# Altium PCB PCB.PcbDoc (part 3 of 3)
Units mm, origin at the board's own origin, x right, y up, seen from the top; angles counter-clockwise.
Board outline 224 x 132 mm, 4 copper layers (Top Layer, Signal Layer 1, Signal Layer 2, Bottom Layer), stack 0.778 mm thick; 181 components, 179 nets, 1018 pads, 539 vias.
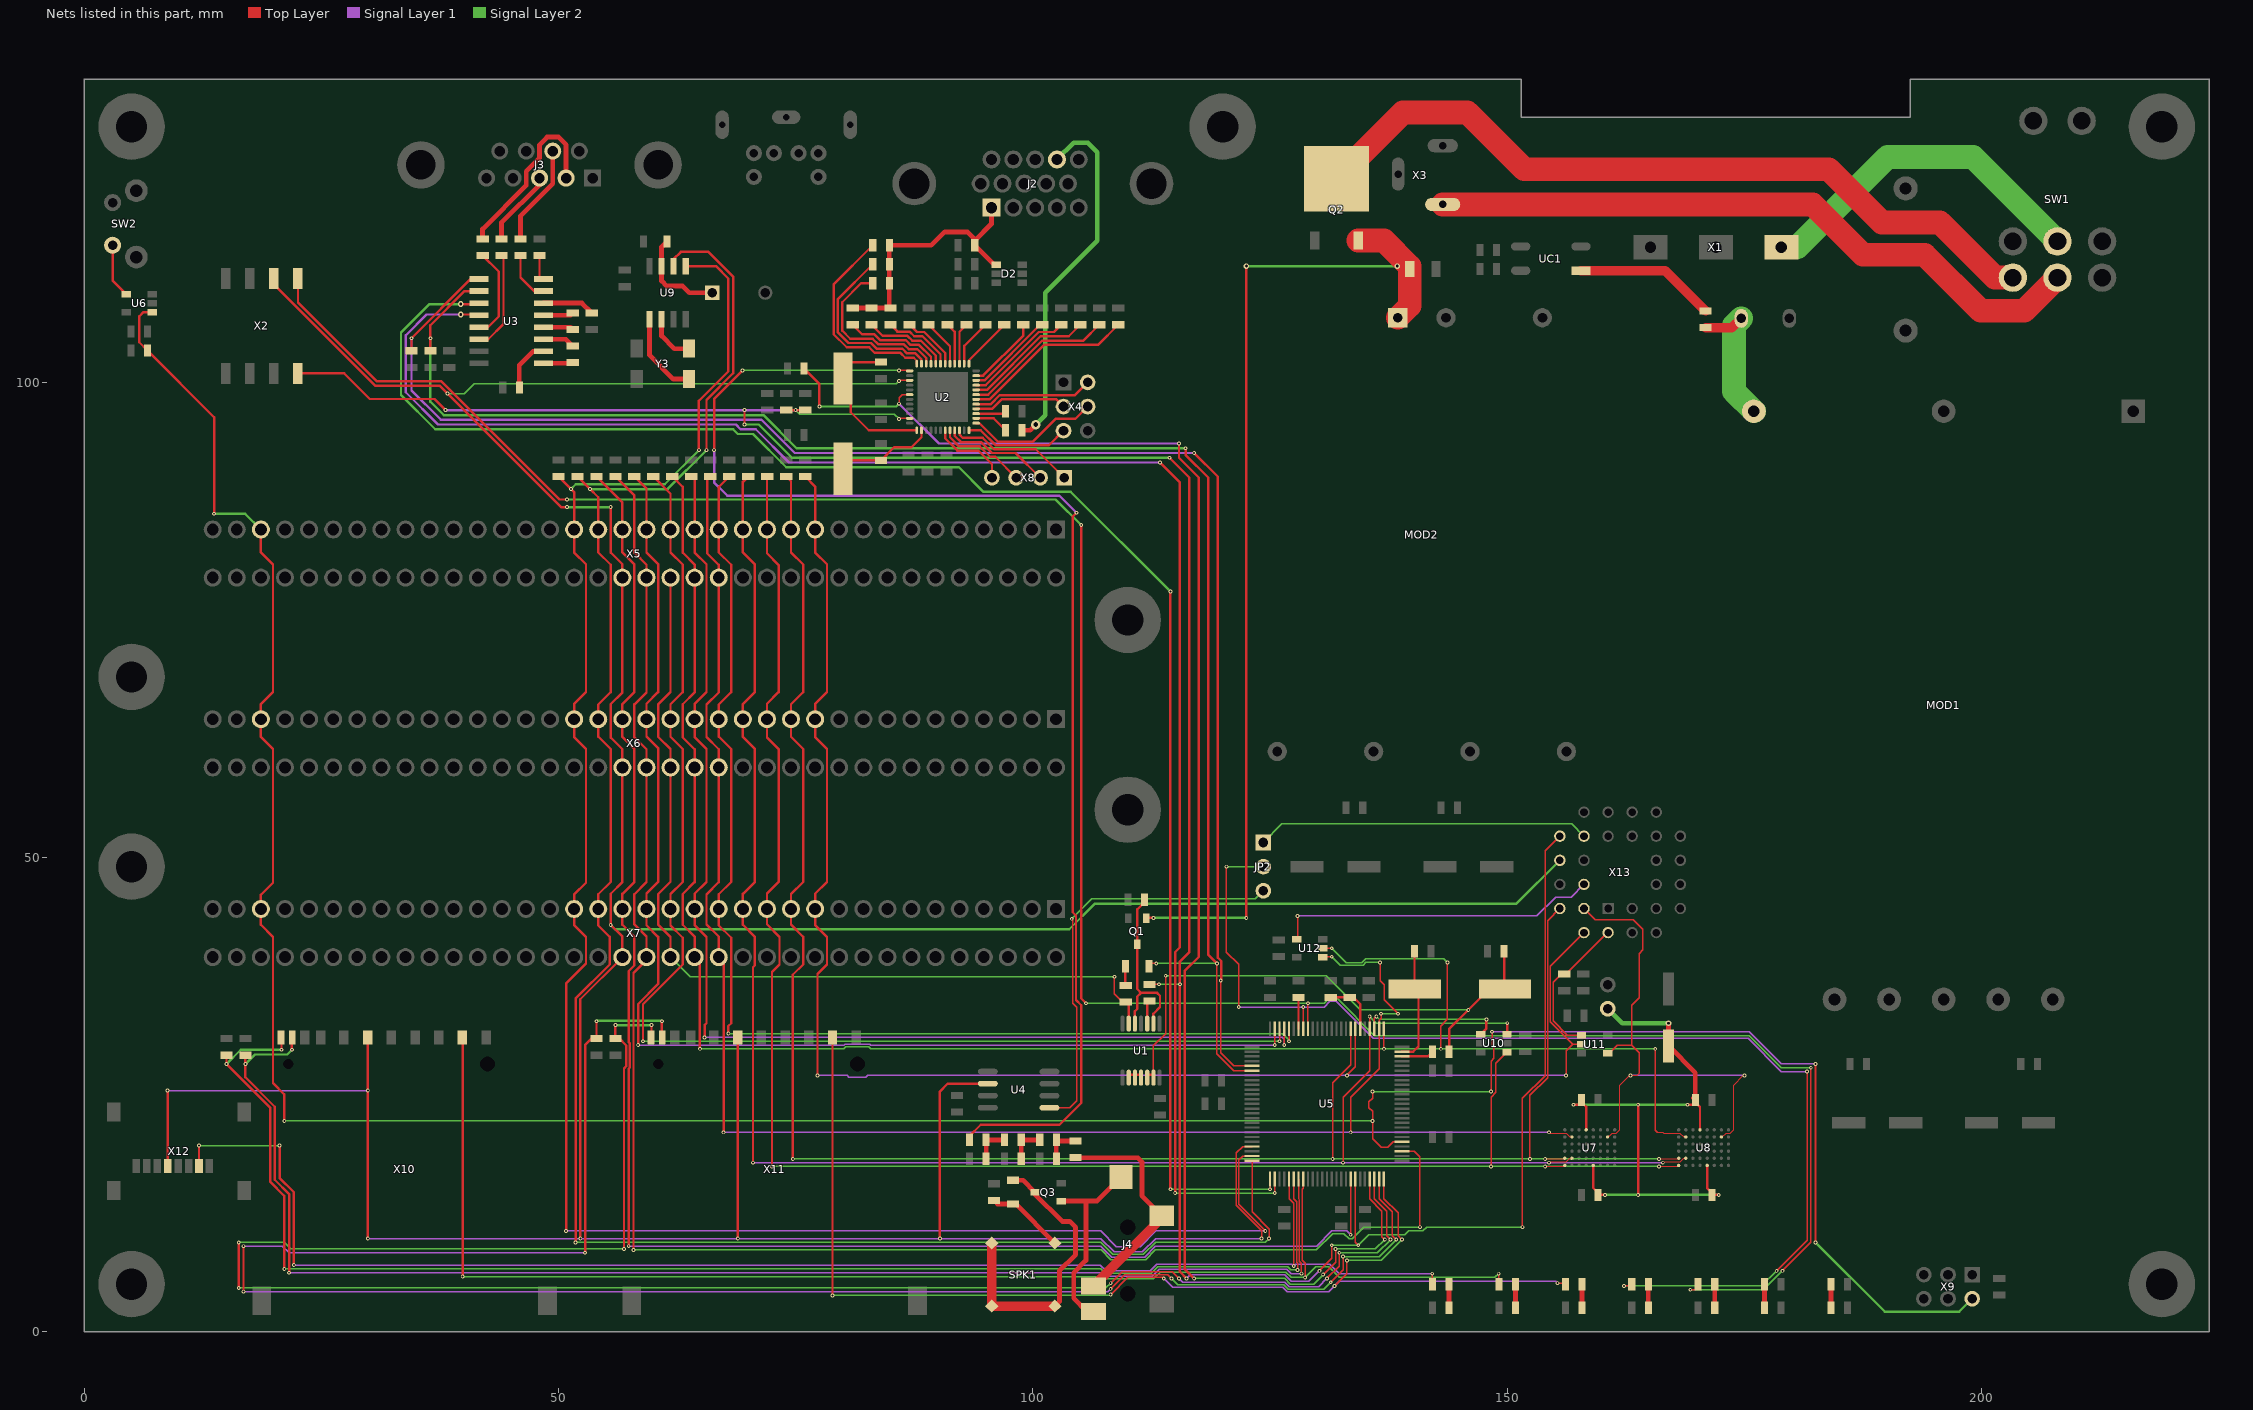
[diagram p5: the nets of this part, all layers, seen from the top]

## Via types
v1: diameter 0.4, hole 0.2, Top Layer to Bottom Layer, tented both sides, 453 vias
v2: diameter 0.6, hole 0.3, Top Layer to Bottom Layer, tented both sides, 46 vias
v3: diameter 1, hole 0.5, Top Layer to Bottom Layer, tented both sides, 34 vias
v4: diameter 2.5, hole 1.25, Top Layer to Bottom Layer, tented both sides, 5 vias
v5: diameter 1, hole 0.5, Top Layer to Bottom Layer, tented bottom, 1 vias

## Nets (pads, with @x,y where several pads share a name; then routed paths per layer and width w, separated by ;. In a path a pad name is that pad's centre, name@x,y a point inside that pad or via, vN(x,y) a via of type N, cw(c..) or ccw(c..) an arc to the next point about the centre after c; other vN are vias at no path point) (continued)
NetC14_1: C14.1 MOD2.1 Q1.1 Q2.2 | length 108.8
  Top Layer w0.25: Q1.1@111.95,43.575 111.975,43.6 v1(112.7,43.6) ; v1(122.5,43.6) v2(122.5,112.3)
  Top Layer w0.5: v2(138.4,112.3) 139.425,112.3 C14.1@139.725,112
  Top Layer w2.5: Q2.2@134.285,114.99 137.01,114.99 C14.1@139.725,112.275 ; MOD2.1@138.46,106.86 139.725,108.125 C14.1@139.725,112
  Signal Layer 2 w0.25: v1(112.7,43.6) v1(122.5,43.6) ; v2(122.5,112.3) v2(138.4,112.3)
NetC16_1: C16.1 U3.1 | length 3.1
  Top Layer w0.5: U3.1@48.4,102.05 51.425,102.05 C16.1@51.5,102.125
NetC16_2: C16.2 U3.3 | length 3.4
  Top Layer w0.5: U3.3@48.4,104.59 50.785,104.59 C16.2@51.5,103.875
NetC19_1: C19.1 U3.5 | length 3.2
  Top Layer w0.5: U3.5@48.4,107.13 51.255,107.13 C19.1@51.5,107.375
NetC19_2: C19.2 U3.4 | length 3.2
  Top Layer w0.5: U3.4@48.4,105.86 51.265,105.86 C19.2@51.5,105.625
NetC20_2: C20.2 U3.2 | length 5.5
  Top Layer w0.5: C20.2@45.875,99.5 45.875,101.875 47.32,103.32 U3.2@48.4,103.32
NetC21_2: C21.2 U3.6 | length 5.5
  Top Layer w0.5: U3.6@48.4,108.4 52.475,108.4 C21.2@53.5,107.375
NetC22_1: C22.1 U2.13 Y1.2 | length 17.4
  Top Layer w0.25: C22.1@84,102.175 80,102.175 Y1.2@80,100.45 80.8,99.65 80.8,96.9 82.696,95.004 U2.13@87.762,95.004
NetC24_1: C24.1 U2.14 Y1.1 | length 10.4
  Top Layer w0.25: Y1.1@80,90.95 80.875,91.825 C24.1@84,91.825 85.375,93.2 87.2,93.2 88.262,94.262 U2.14@88.262,95.004
NetC34_1: C34.1 C39.2 R43.2 | length 4.1
  Top Layer w0.5: C39.2@102.475,18.2 R43.2@102.475,20.2 102.6,20.075 C34.1@104.5,20.075
NetC34_2: C34.2 J4.2 J4.3 | length 24.1
  Top Layer w0.5: C34.2@104.5,18.325 111.075,18.325 111.5,17.9 111.5,14.3 J4.2@113.6,12.2
  Top Layer w1: J4.3@106.4,4.8 113.6,12 J4.2@113.6,12.2
NetC35_2: C35.2 L1.1 U5.31 | length 5.6
  Top Layer w0.25: C35.2@131.4,35.225 L1.1@133.4,35.225 ; L1.1@133.8,35.225 134.5,34.525 U5.31@134.5,31.9
NetC36_1: C36.1 R44.2 U1.12 U1.13 Y2.2 | length 61.4
  Top Layer w0.15: U1.13@112.705,26.759 112.705,27.059 112.705,30.105 114,31.4 v1(114,37.5)
  Top Layer w0.25: U1.12@112.055,27.059 U1.13@112.705,27.059 ; R44.2@143.875,29.5 143.875,31.875 v1(145.9,33.9) 148.1,36.1 Y2.2@149.75,36.1 ; C36.1@149.675,40.1 149.675,36.575 Y2.2@150.075,36.175 ; Y2.2@150.15,36.1 Y2.2@150.075,36.175 ; Y2.2@151.975,36.175 Y2.2@150.075,36.175
  Signal Layer 2 w0.15: v1(114,37.5) 130.9,37.5 134.5,33.9 v1(145.9,33.9)
NetC37_2: C37.2 R41.2 R42.1 | length 4
  Top Layer w0.5: C37.2@95.075,18.2 R41.2@95.075,20.2 R42.1@97.025,20.2
NetC38_2: C38.2 R42.2 R43.1 | length 3.9
  Top Layer w0.5: C38.2@98.775,18.2 R42.2@98.775,20.2 R43.1@100.725,20.2
NetC40_2: C40.2 U5.44 | length 3.2
  Top Layer w0.25: U5.44@128,31.9 C40.2@128,35.125
NetC41_1: C41.1 U5.24 Y2.1 | length 12.2
  Top Layer w0.25: U5.24@138.9,29.5 140.1,29.5 140.65,30.05 140.65,35.7 Y2.1@140.25,36.1 140.225,36.125 C41.1@140.225,40.1 ; Y2.1@140.625,36.125 Y2.1@140.65,36.1
NetC43_1: C43.1 C44.1 C45.1 C46.1 C51.1 JP1.2 U7.D6 U7.E1 U8.D6 U8.E1 | length 66.8
  Top Layer w0.25: v1(157,23.9) 157.55,23.9 C43.1@157.825,24.175 ; C43.1@157.825,24.4 C43.1@157.825,24.175 ; U7.D6@158.323,21.263 158.323,23.677 C43.1@157.825,24.175 ; U7.E1@159.073,17.513 159.073,15.127 159.575,14.625 C45.1@159.575,14.4 v1(160.3,14.4) ; v1(163.8,14.4) v1(163.8,23.9) ; v1(169,23.9) 169.55,23.9 C44.1@169.825,24.175 ; C44.1@169.8,24.425 C44.1@169.825,24.4 C44.1@169.825,24.175 ; U8.D6@170.323,21.263 170.323,23.677 C44.1@169.825,24.175 ; U8.E1@171.073,17.513 171.073,15.127 171.575,14.625 C46.1@171.575,14.4 v1(172.3,14.4)
  Top Layer w0.5: v2(167,32.5) C51.1@167,30.1 169.825,27.275 C44.1@169.825,24.4 ; C44.1@169.6,24.625 C44.1@169.8,24.425
  Signal Layer 2 w0.25: v1(157,23.9) v1(163.8,23.9) v1(169,23.9) ; v1(160.3,14.4) v1(163.8,14.4) v1(172.3,14.4)
  Signal Layer 2 w0.5: JP1.2@160.6,34.03 162.13,32.5 v2(167,32.5)
NetC48_1: C48.1 D4.1 U9.7 | length 10.3
  Top Layer w0.5: D4.1@61.45,114.9 60.865,114.315 U9.7@60.865,112.3 60.865,110.735 61.4,110.2 63.1,110.2 63.8,109.5 C48.1@66.2,109.5
NetD1_1: D1.1 R7.2 | length 2
  Top Layer w0.25: D1.1@109.75,38.5 109.75,36.525 R7.2@109.8,36.475
NetD3_1: D3.1 R40.1 SPK1.1 | length 8.3
  Top Layer w0.5: R40.1@95.9,13.825 96.275,13.45 D3.1@97.9,13.45 98.197,13.45 SPK1.1@102.323,9.323
NetD3_2: D3.2 Q3.3 SPK1.2 | length 31.3
  Top Layer w0.5: D3.2@97.9,15.95 98.975,15.95 Q3.3@100.225,14.7 100.225,14.475 103.1,11.6 103.9,11.6 104.5,11 104.5,8.1 102.8,6.4 102.8,3.153 SPK1.2@102.323,2.677
  Top Layer w1: SPK1.2@95.677,9.323 SPK1.2@95.677,2.677 SPK1.2@102.323,2.677
NetF1_2: F1.2 MOD1.3 R1.1 | length 15.1
  Top Layer w1: R1.1@170.9,105.825 173.685,105.825 F1.2@174.66,106.8
  Signal Layer 2 w2.5: F1.2@174.66,106.8 173.9,106.04 173.9,99.1 MOD1.3@176,97
NetJ4_4: J4.4 J4.5 Q3.1 | length 20.8
  Top Layer w0.5: Q3.1@102.975,13.75 105.6,13.75 ; J4.5@106.4,2.1 105.7,2.1 104.3,3.5 104.3,6.2 105.6,7.5 105.6,13.75 ; J4.4@109.3,16.3 106.75,13.75 105.6,13.75
NetLED1_2: LED1.2 R27.1 | length 2.5
  Top Layer w0.5: LED1.2@184.125,2.5 R27.1@184.125,5
NetLED2_2: LED2.2 R32.1 | length 2.5
  Top Layer w0.5: LED2.2@177.125,2.5 R32.1@177.125,5
NetLED3_1: LED3.1 R53.2 | length 2.5
  Top Layer w0.5: LED3.1@171.875,2.5 R53.2@171.875,5
NetLED4_1: LED4.1 R54.2 | length 2.5
  Top Layer w0.5: LED4.1@164.875,2.5 R54.2@164.875,5
NetLED5_1: LED5.1 R55.2 | length 2.5
  Top Layer w0.5: LED5.1@157.875,2.5 R55.2@157.875,5
NetLED6_1: LED6.1 R59.2 | length 2.5
  Top Layer w0.5: LED6.1@150.875,2.5 R59.2@150.875,5
NetLED7_1: LED7.1 R62.2 | length 2.5
  Top Layer w0.5: LED7.1@143.875,2.5 R62.2@143.875,5
NetQ1_3: Q1.3 R4.2 U1.2 U1.5 | length 19.1
  Top Layer w0.25: U1.5@110.755,32.459 110.755,33.755 111,34 111,35.3 111.4,35.7 ; R4.2@111.775,45.5 111.775,45.275 111,44.5 Q1.3@111,40.825 111,36.1 111.4,35.7 ; U1.2@112.705,32.459 112.705,33.505 113.4,34.2 113.4,35.4 113.1,35.7 111.4,35.7
NetQ2_3: Q2.3 SW1.4 | length 81.4
  Top Layer w2.5: Q2.3@132.005,121.49 139.015,128.5 145.8,128.5 151.8,122.5 183.9,122.5 189.5,116.9 195.6,116.9 201.41,111.09 SW1.4@203.301,111.09
NetR1_2: R1.2 UC1.1 | length 14.9
  Top Layer w1: UC1.1@157.775,111.83 166.645,111.83 R1.2@170.9,107.575
NetR3_1: R3.1 U1.3 | length 2.5
  Top Layer w0.25: U1.3@112.055,32.459 112.055,34.58 R3.1@112.3,34.825
NetR5_1: R5.1 U2.48 | length 21.3
  Top Layer w0.25: R5.1@83.125,114.5 79,110.375 79,105.127 80.377,103.75 82.741,103.75 83.341,103.15 86.041,103.15 86.541,102.65 87.441,102.65 87.762,102.329 U2.48@87.762,102.004
NetR6_1: R6.1 U2.47 | length 19.2
  Top Layer w0.25: R6.1@83.125,112.5 79.45,108.825 79.45,105.314 80.564,104.2 82.927,104.2 83.527,103.6 86.227,103.6 86.727,103.1 87.627,103.1 88.262,102.465 U2.47@88.262,102.004
NetR8_1: R8.1 U2.46 | length 17.7
  Top Layer w0.25: R8.1@83.125,110.5 81.9,110.5 79.9,108.5 79.9,105.5 80.75,104.65 83.114,104.65 83.714,104.05 86.414,104.05 86.914,103.55 87.814,103.55 88.762,102.601 U2.46@88.762,102.004
NetR9_1: R9.1 U2.45 | length 10.4
  Top Layer w0.25: R9.1@81,106.125 82.025,105.1 83.3,105.1 83.9,104.5 86.6,104.5 87.1,104 88,104 89.262,102.738 U2.45@89.262,102.004
NetR10_1: R10.1 U2.44 | length 9
  Top Layer w0.25: R10.1@83,106.125 84.175,104.95 86.786,104.95 87.286,104.45 88.186,104.45 89.762,102.874 U2.44@89.762,102.004
NetR11_1: R11.1 U2.43 | length 7.6
  Top Layer w0.25: R11.1@85,106.125 85.725,105.4 87,105.4 87.5,104.9 88.373,104.9 90.262,103.011 U2.43@90.262,102.004
NetR13_1: R13.1 U2.42 | length 6.1
  Top Layer w0.25: R13.1@87,106.125 87.775,105.35 88.559,105.35 90.762,103.147 U2.42@90.762,102.004
NetR14_1: R14.1 U2.41 | length 5.1
  Top Layer w0.25: R14.1@89,106.125 91.262,103.863 U2.41@91.262,102.004
NetR16_1: R16.1 U2.40 | length 4.4
  Top Layer w0.25: R16.1@91,106.125 91.762,105.363 U2.40@91.762,102.004
NetR17_1: R17.1 U2.39 | length 4.4
  Top Layer w0.25: U2.39@92.262,102.004 92.262,105.387 R17.1@93,106.125
NetR18_1: R18.1 U2.38 | length 5
  Top Layer w0.25: U2.38@92.762,102.004 92.762,103.887 R18.1@95,106.125
NetR19_1: R19.1 U2.37 | length 5.7
  Top Layer w0.25: U2.37@93.262,102.004 93.262,102.387 R19.1@97,106.125
NetR20_1: R20.1 U2.35 | length 7.9
  Top Layer w0.25: U2.35@94.012,100.754 94.754,100.754 99,105 R20.1@99,106.125
NetR24_1: R24.1 U2.34 | length 9.4
  Top Layer w0.25: U2.34@94.012,100.254 94.891,100.254 100.761,106.125 R24.1@101,106.125
NetR25_1: R25.1 U2.33 | length 11.6
  Top Layer w0.25: U2.33@94.012,99.754 95.027,99.754 100.623,105.35 102.225,105.35 R25.1@103,106.125
NetR26_1: R26.1 U2.32 | length 13.8
  Top Layer w0.25: U2.32@94.012,99.254 95.163,99.254 100.809,104.9 103.775,104.9 R26.1@105,106.125
NetR28_1: R28.1 U3.14 | length 10.6
  Top Layer w0.25: U3.14@41.6,104.59 42.59,104.59 44.2,106.2 44.2,113.225 R28.1@44,113.425
NetR29_1: R29.1 U2.31 | length 16
  Top Layer w0.25: U2.31@94.012,98.754 95.3,98.754 100.996,104.45 105.325,104.45 R29.1@107,106.125
NetR30_1: R30.1 U3.7 | length 5.3
  Top Layer w0.25: R30.1@46,113.425 46,111.1 47.43,109.67 U3.7@48.4,109.67
NetR31_1: R31.1 U2.30 | length 18.2
  Top Layer w0.25: U2.30@94.012,98.254 95.436,98.254 101.182,104 106.875,104 R31.1@109,106.125
NetR33_1: R33.1 U3.13 | length 9.7
  Top Layer w0.25: U3.13@41.6,105.86 42.56,105.86 43.7,107 43.7,111.725 R33.1@42,113.425
NetR34_1: R34.1 U3.8 | length 2.9
  Top Layer w0.25: R34.1@48,113.425 48,110.94 U3.8@48.4,110.94
NetR37_1: R37.1 U2.27 | length 3.2
  Top Layer w0.25: U2.27@94.012,96.754 96.879,96.754 R37.1@97.125,97
NetR38_1: R38.1 U2.26 | length 3.6
  Top Layer w0.25: U2.26@94.012,96.254 95.871,96.254 R38.1@97.125,95
NetR41_1: R41.1 U2.1 | length 146.6
  Top Layer w0.15: v1(85.9,101.3) 86.966,101.3 U2.1@87.012,101.254
  Top Layer w0.25: v1(66.4,92.9) 66.4,98.3 v1(69.4,101.3) ; R41.1@93.325,20.2 93.325,20.625 94.5,21.8 102.8,21.8 105.1,24.1 105.1,34.4 104.55,34.95 104.55,43.85 104.2,44.2 104.2,85.9 v1(104.6,86.3)
  Signal Layer 1 w0.25: v1(66.4,92.9) 66.4,89.5 67.8,88.1 102.8,88.1 v1(104.6,86.3)
  Signal Layer 2 w0.15: v1(69.4,101.3) v1(85.9,101.3)
NetR44_1: R44.1 U5.23 | length 3.4
  Top Layer w0.25: U5.23@138.9,29 141.625,29 R44.1@142.125,29.5
NetSW1_2: SW1.2 X1.1 | length 36.7
  Signal Layer 2 w2.5: X1.1@178.9,114.3 180.602,114.3 190.102,123.8 199.1,123.8 SW1.2@208,114.9
NetSW1_5: SW1.5 X3.1 | length 70.9
  Top Layer w2.5: X3.1@143.2,118.8 182.2,118.8 187.5,113.5 194,113.5 199.9,107.6 204.51,107.6 SW1.5@208,111.09
NetSW2_2: SW2.2 U6.4 | length 5.7
  Top Layer w0.25: SW2.2@3,114.5 3,110.775 U6.4@4.425,109.35
NetU1_9: U1.9 U1.10 U1.11 | length 1.3
  Top Layer w0.25: U1.9@110.105,27.059 U1.11@111.405,27.059
NetU2_19: U2.19 X8.4 | length 8.3
  Top Layer w0.25: U2.19@90.762,95.004 90.762,94.129 92.041,92.85 94.25,92.85 95.69,91.41 X8.4@95.69,90
NetU2_20: U2.20 X8.3 | length 9.5
  Top Layer w0.25: U2.20@91.262,95.004 91.262,94.265 92.227,93.3 94.4,93.3 95.5,92.2 96.03,92.2 X8.3@98.23,90
NetU2_21: U2.21 X8.2 | length 11.4
  Top Layer w0.25: U2.21@91.762,95.004 91.762,94.401 92.414,93.75 94.55,93.75 95.7,92.6 98.17,92.6 X8.2@100.77,90
NetU2_22: U2.22 X8.1 | length 13.4
  Top Layer w0.25: U2.22@92.262,95.004 92.262,94.538 92.6,94.2 94.7,94.2 95.9,93 100.31,93 X8.1@103.31,90
NetU2_24: U2.24 X4.5 | length 11.3
  Top Layer w0.25: U2.24@93.262,95.004 94.496,95.004 96.1,93.4 101.67,93.4 X4.5@103.23,94.96
NetU2_25: U2.25 X4.4 | length 14.1
  Top Layer w0.25: U2.25@94.012,95.754 94.346,95.754 96.3,93.8 100,93.8 102.4,96.2 104.47,96.2 X4.4@105.77,97.5
NetU2_28: U2.28 X4.3 | length 9.9
  Top Layer w0.25: U2.28@94.012,97.254 95.709,97.254 96.705,98.25 102.48,98.25 X4.3@103.23,97.5
NetU2_29: U2.29 X4.2 | length 12.7
  Top Layer w0.25: U2.29@94.012,97.754 95.573,97.754 96.518,98.7 104.43,98.7 X4.2@105.77,100.04
NetU9_1: U9.1 Y3.2 | length 9
  Top Layer w0.5: U9.1@59.595,106.7 59.595,102.905 62.1,100.4 Y3.2@63.75,100.4
NetU9_2: U9.2 Y3.1 | length 5.2
  Top Layer w0.5: U9.2@60.865,106.7 60.865,104.935 62.2,103.6 Y3.1@63.75,103.6
RD: J3.2 R33.2 | length 19.4
  Top Layer w0.5: R33.2@42,115.175 42,116.2 46.6,120.8 46.6,122.3 48,123.7 48,125.1 48.8,125.9 50,125.9 50.8,125.1 50.8,121.586 J3.2@50.794,121.58
RED: D2.4 J2.1 R5.2 R6.2 R8.2 R9.2 R10.2 R11.2 R23.2 | length 28.5
  Top Layer w0.5: R9.2@81,107.875 R10.2@83,107.875 R11.2@85,107.875 84.875,108 R8.2@84.875,110.5 R6.2@84.875,112.5 R5.2@84.875,114.5 89.3,114.5 90.7,115.9 93.1,115.9 93.875,115.125 R23.2@93.875,114.975 ; J2.1@95.64,118.46 95.64,116.74 R23.2@93.875,114.975 ; D2.4@96.125,112.45 95.925,112.45 R23.2@93.875,114.5 R23.2@93.875,114.975
RTS: J3.7 R30.2 | length 10.7
  Top Layer w0.5: R30.2@46,115.175 46,117.6 49.397,120.997 J3.7@49.397,124.42
RXD: U3.12 U5.77 | length 187.3
  Top Layer w0.15: v1(125.5,14.6) U5.77@125.5,16.075
  Top Layer w0.25: v2(39.7,107.2) 41.53,107.2 U3.12@41.6,107.13 ; v1(113.4,91.6) 115.5,89.5 115.5,40.5 115,40 v1(115,14.6)
  Signal Layer 1 w0.25: v2(39.7,107.2) 36.1,107.2 33.9,105 33.9,99 37.3,95.6 68.7,95.6 69.2,95.1 70.8,95.1 74.3,91.6 v1(113.4,91.6)
  Signal Layer 2 w0.15: v1(115,14.6) v1(125.5,14.6)
SCK: U2.3 U4.6 U5.72 X2.C6 X5.38 X6.38 X7.38 X10.5 X11.5 X12.5 X13.21 | length 479.7
  Top Layer w0.15: v1(85.9,100.2) 85.954,100.254 U2.3@87.012,100.254 ; U5.72@123.1,19.5 122.1,19.5 121.425,18.825 121.425,13.286 124.1,10.611 v1(124.1,9.8)
  Top Layer w0.25: v1(8.8,25.4) 8.8,17.455 X12.5@8.805,17.45 ; X2.C6@20,111 20,110.373 30.673,99.7 37.473,99.7 v1(38.3,98.873) 50.273,86.9 v1(50.9,86.9) ; X10.5@29.88,31 29.9,30.98 v1(29.9,25.4) v1(29.9,9.8) ; v1(52.3,9.8) 52.3,35.03 X7.38@56.73,39.46 56.73,41.63 v1(55.5,42.86) 55.5,46.14 56.73,47.37 56.73,61.37 55.5,62.6 55.5,66.14 56.73,67.37 56.73,80.87 55.5,82.1 v1(55.5,86.9) ; X11.5@68.88,31 68.9,30.98 v1(68.9,9.8) ; v1(90.2,9.8) 90.2,25.3 91.03,26.13 U4.6@95.252,26.13
  Signal Layer 1 w0.15: v1(8.8,25.4) v1(29.9,25.4) ; v1(29.9,9.8) v1(52.3,9.8) v1(68.9,9.8) v1(90.2,9.8) 107.155,9.8 108.555,8.4 111.545,8.4 112.945,9.8 v1(124.1,9.8)
  Signal Layer 2 w0.15: v1(38.3,98.873) 40.073,98.873 41.1,99.9 85.6,99.9 v1(85.9,100.2)
  Signal Layer 2 w0.25: v1(50.9,86.9) v1(55.5,86.9) ; v1(55.5,42.86) 55.96,42.4 103.839,42.4 106.539,45.1 150.98,45.1 X13.21@155.55,49.67
SCL: R46.1 U5.75 U9.6 X5.39 X6.39 X7.39 | length 210.9
  Top Layer w0.15: U5.75@123.1,18 123.1,12.6 124.9,10.8 v1(124.9,9.8)
  Top Layer w0.25: v1(51.8,9.4) 51.8,35.1 55.4,38.7 55.4,41.6 54.19,42.81 54.19,46.09 55.5,47.4 55.5,61.4 54.19,62.71 54.19,66.09 55.5,67.4 55.5,80.82 54.19,82.13 54.19,87.935 v1(53.325,88.8) R46.1@52,90.125 ; U9.6@62.135,112.3 62.135,113.035 62.9,113.8 65.8,113.8 68.4,111.2 68.4,101 65.6,98.2 v1(65.6,92.9)
  Signal Layer 2 w0.15: v1(51.8,9.4) 107.167,9.4 108.442,8.125 111.658,8.125 112.933,9.4 124.5,9.4 v1(124.9,9.8)
  Signal Layer 2 w0.25: v1(53.325,88.8) 61.5,88.8 v1(65.6,92.9)
SDA: R45.1 U5.74 U9.5 X5.41 X6.41 X7.41 | length 208.6
  Top Layer w0.15: U5.74@123.1,18.5 122.1,18.5 121.7,18.1 121.7,13.4 v1(124.5,10.6)
  Top Layer w0.25: R45.1@50,90.125 v1(51.325,88.8) 51.65,88.475 51.65,82.13 52.9,80.88 52.9,67.4 51.65,66.15 51.65,62.65 52.9,61.4 52.9,47.3 51.65,46.05 51.65,42.85 52.9,41.6 52.9,38.8 50.8,36.7 v1(50.8,10.6) ; U9.5@63.405,112.3 66.6,112.3 67.9,111 67.9,101.2 64.8,98.1 v1(64.8,92.9)
  Signal Layer 1 w0.15: v1(50.8,10.6) 107.133,10.6 108.783,8.95 111.317,8.95 112.967,10.6 v1(124.5,10.6)
  Signal Layer 2 w0.25: v1(51.325,88.8) 51.825,89.3 61.2,89.3 v1(64.8,92.9)
TD: J3.3 R28.2 | length 8.1
  Top Layer w0.5: R28.2@44,115.175 44,116.9 48,120.9 J3.3@48,121.58
TXD: U3.11 U5.76 | length 180.3
  Top Layer w0.15: v1@125,15 U5.76@125,16.075
  Top Layer w0.25: v2(39.7,108.3) 41.5,108.3 U3.11@41.6,108.4 ; v1(114.5,15) v1(114.5,78)
  Signal Layer 2 w0.15: v1(114.5,15) v1(125,15)
  Signal Layer 2 w0.25: v2(39.7,108.3) 36.4,108.3 33.4,105.3 33.4,98.7 37,95.1 68.4,95.1 68.9,94.6 70.5,94.6 74,91.1 92.2,91.1 94.8,88.5 104,88.5 v1(114.5,78)
VSYNC: J2.14 R38.2 | length 38.5
  Top Layer w0.5: R38.2@98.875,95 99.7,95 v3(100.3,95.6)
  Signal Layer 2 w0.5: v3(100.3,95.6) 101.3,96.6 101.3,109.5 106.8,115 106.8,124.3 105.8,125.3 104.3,125.3 J2.14@102.54,123.54
WP1: R61.1 U5.81 X10.WP | length 150
  Top Layer w0.15: U5.81@127.5,16.075 127.5,14 127.8,13.7 127.8,7.3 127.9,7.2 v1(127.9,6.5)
  Top Layer w0.25: R61.1@15,29.125 v1(15,28.2) 19.6,23.6 19.6,15.8 21.1,14.3 v1(21.1,6.6) ; X10.WP@20.75,31 20.8,30.95 v1(20.8,29.7)
  Signal Layer 2 w0.15: v1(21.1,6.6) 107.138,6.6 107.613,6.125 112.487,6.125 113.187,6.825 126.342,6.825 126.875,6.825 127.2,6.5 v1(127.9,6.5)
  Signal Layer 2 w0.25: v1(15,28.2) 16.5,29.7 v1(20.8,29.7)
WP2: R57.1 U5.98 X11.WP | length 208
  Top Layer w0.15: v1(108.2,5.1) 109.4,6.3 114.7,6.3 v1(115.4,5.6) ; v1(131,5.6) 132.3,6.9 v1(132.3,8.3) ; U5.98@136,16.075 136,14 137.3,12.7 137.3,10.1 v1(137.7,9.7)
  Top Layer w0.25: v1(16.3,4.6) v1(16.3,9.4) ; v1(56,32.3) R57.1@56,30.875 56.425,30.875 57.15,30.15 57.15,27.98 56.9,27.73 v1(56.9,8.7) ; X11.WP@59.75,31 59.8,31.05 v1(59.8,32.3)
  Signal Layer 1 w0.15: v1(115.4,5.6) 115.8,5.2 126.555,5.2 127.03,4.725 130.125,4.725 v1(131,5.6)
  Signal Layer 2 w0.15: v1(16.3,4.6) 107.7,4.6 v1(108.2,5.1) ; v1(16.3,9.4) 21.1,9.4 21.8,8.7 v1(56.9,8.7) ; v1(132.3,8.3) 136.3,8.3 v1(137.7,9.7)
  Signal Layer 2 w0.25: v1(56,32.3) v1(59.8,32.3)
~0000: R65.1 U5.27 U7.B5 U12.1 X5.30 X6.30 X7.30 | length 190.1
  Top Layer w0.125: v1(154.4,21) 154.5,20.9 156.198,20.9 156.585,20.513 U7.B5@156.823,20.513
  Top Layer w0.15: U12.1@130.575,39.45 130.625,39.5 v1(131.5,39.5) ; v1(133.5,21) 133.5,24.689 136.5,27.689 U5.27@136.5,31.9 136.5,32.8 136.7,33 v1(136.7,33.5) ; v1(136.6,38.9) 136.6,37 137.05,36.55 137.05,34.95 v1(138.5,33.5)
  Top Layer w0.25: R65.1@66,90.125 65.665,89.79 65.665,82.035 66.89,80.81 66.89,67.37 65.6,66.08 65.6,62.66 66.89,61.37 66.89,47.37 65.6,46.08 65.6,42.92 66.89,41.63 X7.30@66.89,39.46 67.4,38.95 v1(67.4,21)
  Signal Layer 1 w0.15: v1(67.4,21) v1(133.5,21) v1(154.4,21)
  Signal Layer 2 w0.15: v1(131.5,39.5) 132.4,38.6 134.8,38.6 135.1,38.9 v1(136.6,38.9) ; v1(136.7,33.5) v1(138.5,33.5)
~8000: R66.1 U5.26 U8.B5 U12.2 X5.32 X6.32 X7.32 | length 202.2
  Top Layer w0.125: 165.8,21 166.4,21 166.5,20.9 168.198,20.9 168.585,20.513 U8.B5@168.823,20.513
  Top Layer w0.15: U12.2@130.575,40.4 v1(131.5,40.4) ; v1(137,29.8) U5.26@137,31.9 ; v1(143,29.8) 143,32.2 143.7,32.9 v1(143.7,38.9) ; v1(165.6,29.8) 165.6,21.2 165.8,21
  Top Layer w0.25: R66.1@62,90.125 63.1,89.025 63.1,82.1 64.35,80.85 64.35,67.37 63.1,66.12 63.1,62.62 64.35,61.37 64.35,47.37 63.1,46.12 63.1,42.88 64.35,41.63 X7.32@64.35,39.46 ; X7.32@64.35,39.42 X7.32@64.35,39.46 ; v1(64.9,29.8) 64.9,38.91 X7.32@64.35,39.46
  Signal Layer 2 w0.15: v1(64.9,29.8) 80.089,29.8 80.289,30 82.7,30 82.9,29.8 v1(137,29.8) v1(143,29.8) v1(165.6,29.8) ; v1(131.5,40.4) 133.025,38.875 134.675,38.875 135.1,39.3 143.3,39.3 v1(143.7,38.9)
~BHE: R63.1 U5.29 U7.B2 U8.B2 U10.6 X5.27 X6.27 X7.27 | length 208.9
  Top Layer w0.125: v1(154.4,17.8) 154.5,17.9 156.223,17.9 156.585,18.263 U7.B2@156.823,18.263 ; v1(166.4,17.8) 166.5,17.9 168.223,17.9 168.585,18.263 U8.B2@168.823,18.263
  Top Layer w0.15: v1(132.7,17.8) 132.7,24.7 135.5,27.5 U5.29@135.5,31.9 v1(135.5,33.2)
  Top Layer w0.25: R63.1@70,90.125 69.43,89.555 69.43,82.13 70.7,80.86 70.7,67.4 69.43,66.13 69.43,62.67 70.7,61.4 70.7,47.4 69.43,46.13 69.43,42.87 70.7,41.6 70.7,38.6 70.5,38.4 v1(70.5,17.8) ; U10.6@149.975,31.35 150,31.375 v1(150,32.5)
  Signal Layer 1 w0.15: v1(70.5,17.8) v1(132.7,17.8) v1(154.4,17.8) v1(166.4,17.8)
  Signal Layer 2 w0.15: v1(135.5,33.2) 136.2,32.5 v1(150,32.5)
~BLE: R64.1 U7.A1 U8.A1 U10.4 X5.25 X6.25 X7.25 | length 186.1
  Top Layer w0.125: v1(154,17.4) 155.96,17.4 U7.A1@156.073,17.513 ; v1(166,17.4) 167.96,17.4 U8.A1@168.073,17.513
  Top Layer w0.15: v1(148.3,17.4) 148.3,24.7 148.8,25.2 148.8,28.275 U10.4@149.975,29.45
  Top Layer w0.25: R64.1@72,90.125 71.97,90.095 71.97,82.03 73.2,80.8 73.2,67.4 71.97,66.17 71.97,62.63 73.2,61.4 73.2,47.4 71.97,46.17 71.97,42.93 73.3,41.6 73.3,38.7 72.5,37.9 v1(72.5,17.4)
  Signal Layer 2 w0.15: v1(72.5,17.4) v1(154,17.4) v1(166,17.4)
~BLZ: U5.28 U10.1 | length 14.9
  Top Layer w0.15: U5.28@136,31.9 136,33 v1(136.2,33.2)
  Top Layer w0.25: U10.1@147.225,31.35 147.8,31.925 v1(147.8,32.9)
  Signal Layer 2 w0.15: v1(136.2,33.2) 136.5,32.9 v1(147.8,32.9)
~CTS: R35.2 U3.9 U5.55 | length 170
  Top Layer w0.15: v1(119.8,37) 119.8,29.4 121.2,28 U5.55@123.1,28
  Top Layer w0.25: R35.2@34.5,103.375 v1(34.5,104.7) 40.74,110.94 U3.9@41.6,110.94 ; v1(117,92.6) 119.5,90.1 119.5,39.4 119.85,39.05 119.85,37.05 v1(119.8,37)
  Signal Layer 1 w0.25: v1(34.5,104.7) 34.5,99.2 37.6,96.1 71.4,96.1 74.9,92.6 v1(117,92.6)
~DT1: R60.1 U5.82 X10.DET | length 149.1
  Top Layer w0.15: U5.82@128,16.075 128,14 128.1,13.9 128.1,7.4 128.3,7.2 v1(128.3,6.1)
  Top Layer w0.25: R60.1@17,29.125 v1(17,28.2) 17,26.8 20.1,23.7 20.1,16 21.6,14.5 v1(21.6,6.2) ; v1(21.9,29.7) 21.9,30.95 X10.DET@21.95,31
  Signal Layer 1 w0.15: v1(21.6,6.2) 107.149,6.2 107.499,5.85 112.601,5.85 113.301,6.55 126.761,6.55 127.211,6.1 v1(128.3,6.1)
  Signal Layer 2 w0.25: v1(17,28.2) 18,29.2 21.4,29.2 v1(21.9,29.7)
~DT2: R56.1 U5.99 X11.DET | length 208
  Top Layer w0.15: v1(108.2,4.5) 109.7,6 114.2,6 v1(114.6,5.6) ; v1(131.4,5.2) 132.7,6.5 v1(132.7,7.9) ; U5.99@136.5,16.075 136.5,14 137.9,12.6 137.9,10.1 v1(138.3,9.7)
  Top Layer w0.25: v1(16.8,4.2) v1(16.8,9) ; v1(52.8,8.3) 52.8,30.2 53.475,30.875 R56.1@54,30.875 v1(54,32.7) ; v1(60.9,32.7) 60.9,31.05 X11.DET@60.95,31
  Signal Layer 1 w0.15: v1(16.8,4.2) 107.9,4.2 v1(108.2,4.5) ; v1(16.8,9) 20.9,9 21.6,8.3 v1(52.8,8.3)
  Signal Layer 2 w0.15: v1(114.6,5.6) 115.275,4.925 126.442,4.925 126.917,4.45 130.65,4.45 v1(131.4,5.2) ; v1(132.7,7.9) 136.5,7.9 v1(138.3,9.7)
  Signal Layer 2 w0.25: v1(54,32.7) 54.05,32.75 60.85,32.75 v1(60.9,32.7)
~EPFI: R7.1 U1.6 X5.34 X6.34 X7.34 | length 95.6
  Top Layer w0.15: v1(108.6,37.4) 108.6,35.6 109.475,34.725 R7.1@109.8,34.725
  Top Layer w0.25: X7.34@61.81,39.46 61.81,41.59 60.5,42.9 60.5,46.1 61.81,47.41 61.81,61.39 60.5,62.7 60.5,66.1 61.81,67.41 X5.34@61.81,79.46 ; R7.1@109.8,34.725 110.105,34.42 U1.6@110.105,32.459
  Signal Layer 2 w0.15: X7.34@61.81,39.46 63.87,37.4 v1(108.6,37.4)
~EVE: R58.1 U2.6 U5.97 | length 166.4
  Top Layer w0.15: v1(85.9,97.8) 85.9,98.4 86.254,98.754 U2.6@87.012,98.754 ; v1(130.6,6) 131.9,7.3 v1(131.9,8.7) ; U5.97@135.5,16.075 135.5,14 136.8,12.7 136.8,10 v1(137.1,9.7)
  Top Layer w0.25: R58.1@75.875,101.5 77.5,99.875 v1(77.5,97.5) ; v1(115.4,93.6) 115.4,92.1 117.5,90 117.5,39.5 116,38 116,6.6 v1(117,5.6)
  Signal Layer 1 w0.25: v1(85.9,97.8) 90.1,93.6 v1(115.4,93.6)
  Signal Layer 2 w0.15: v1(117,5.6) 126.544,5.6 127.144,5 129.6,5 v1(130.6,6) ; v1(131.9,8.7) 136.1,8.7 v1(137.1,9.7)
  Signal Layer 2 w0.25: v1(77.5,97.5) 85.6,97.5 v1(85.9,97.8)
~EXP: R50.1 U5.3 X5.36 X6.36 X7.36 | length 180.3
  Top Layer w0.15: U5.3@138.9,19 140.2,19 140.8,18.4 v1(140.8,11)
  Top Layer w0.25: R50.1@56,90.125 58,88.125 58,82.1 59.27,80.83 59.27,67.37 58,66.1 58,62.64 59.27,61.37 59.27,47.37 58,46.1 58,42.9 59.27,41.63 59.27,39.17 57.9,37.8 v1(57.9,8.6)
  Signal Layer 2 w0.15: v1(57.9,8.6) 107.189,8.6 108.214,7.575 111.886,7.575 112.911,8.6 129.889,8.6 131.614,10.325 132.775,10.325 133.325,9.775 133.675,9.775 134.9,11 v1(140.8,11)
~F000: R67.1 U5.46 X5.29 X6.29 X7.29 | length 122.8
  Top Layer w0.15: v1(127,30.6) U5.46@127,31.9
  Top Layer w0.25: v1(67.9,31.4) 67.9,32.2 68.2,32.5 68.2,41.5 66.89,42.81 66.89,46.09 68.2,47.4 68.2,61.4 66.89,62.71 66.89,66.09 68.2,67.4 68.2,80.82 66.89,82.13 66.89,89.015 R67.1@68,90.125
  Signal Layer 2 w0.15: v1(67.9,31.4) 126.289,31.4 127,30.689 v1(127,30.6)
~FFC8: R68.1 U5.47 X5.31 X6.31 X7.31 | length 125.4
  Top Layer w0.15: v1(126.5,30.2) U5.47@126.5,31.9
  Top Layer w0.25: R68.1@64,90.125 64.35,89.775 64.35,82.13 65.6,80.88 65.6,67.4 64.35,66.15 64.35,62.65 65.6,61.4 65.6,47.4 64.35,46.15 64.35,42.85 65.6,41.6 65.6,32.5 65.4,32.3 v1(65.4,31)
  Signal Layer 1 w0.15: v1(65.4,31) 126.3,31 126.5,30.8 v1(126.5,30.2)
~FFD0: R69.1 U5.48 X5.33 X6.33 X7.33 | length 133.1
  Top Layer w0.15: v1(126,30.6) U5.48@126,31.9
  Top Layer w0.25: v1(58.9,30.6) 58.9,34.5 63.1,38.7 63.1,41.5 61.81,42.79 61.81,46.11 63.1,47.4 63.1,61.4 61.81,62.69 61.81,66.11 63.1,67.4 63.1,80.84 61.81,82.13 61.81,88.315 R69.1@60,90.125
  Signal Layer 2 w0.15: v1(58.9,30.6) v1(126,30.6)
~FFD8: R70.1 U5.49 X5.35 X6.35 X7.35 | length 132.8
  Top Layer w0.15: v1(125.5,30.2) U5.49@125.5,31.9
  Top Layer w0.25: R70.1@58,90.125 59.27,88.855 59.27,82.13 60.5,80.9 60.5,67.4 59.27,66.17 59.27,62.73 60.5,61.5 60.5,47.4 59.27,46.17 59.27,42.83 60.5,41.6 60.5,36.63 58.4,34.53 v1(58.4,30.2)
  Signal Layer 1 w0.15: v1(58.4,30.2) 80.1,30.2 80.175,30.275 82.814,30.275 82.889,30.2 v1(125.5,30.2)
  Signal Layer 2 w0.15: v1@125.425,30.275 v1(125.5,30.2)
~INTI: R3.2 R15.1 R48.1 U2.11 U5.94 X2.C1 X13.19 | length 296.5
  Top Layer w0.15: v1(85.9,96.2) 85.954,96.254 U2.11@87.012,96.254 ; R3.2@112.3,36.575 112.325,36.6 v1(113.3,36.6) ; v1(130.2,6.4) 131.5,7.7 v1(131.5,9.1) ; U5.94@134,16.075 134,9.4 v1(134.3,9.1) ; v1(151.6,11) 151.6,24.578 154,26.978 154,50.66 X13.19@155.55,52.21
  Top Layer w0.25: X2.C1@22.54,101 27.4,101 30.1,98.3 36.925,98.3 v1(38.1,97.125) ; v1(69.6,95.6) v1(69.6,97.125) ; R48.1@74,97.125 v1(75,97.125) R15.1@76,97.125 ; v1(114.4,92.1) 116.5,90 116.5,40 115.5,39 v1(115.5,36.6) 115.5,6.3 v1(116.2,5.6)
  Signal Layer 1 w0.15: v1(116.2,5.6) 116.6,6 126.533,6 127.233,5.3 129.1,5.3 v1(130.2,6.4)
  Signal Layer 1 w0.25: v1(38.1,97.125) v1(69.6,97.125) v1(75,97.125)
  Signal Layer 2 w0.15: v1(75,97.125) 75.425,96.7 85.4,96.7 v1(85.9,96.2) ; v1(113.3,36.6) v1(115.5,36.6) ; v1(131.5,9.1) v1(134.3,9.1) 135.4,10.2 139.2,10.2 139.6,10.6 141.1,10.6 141.5,11 v1(151.6,11)
  Signal Layer 2 w0.25: v1(69.6,95.6) 71.1,95.6 74.6,92.1 v1(114.4,92.1)
~INTX: R47.1 U5.93 X5.37 X6.37 X7.37 | length 169
  Top Layer w0.15: v1(133.5,10.2) U5.93@133.5,16.075
  Top Layer w0.25: R47.1@54,90.125 56.73,87.395 56.73,82.13 58,80.86 58,67.4 56.73,66.13 56.73,62.67 58,61.4 58,47.4 56.73,46.13 56.73,42.87 58,41.6 58,38.6 57.4,38 57.4,30.5 57.525,30.375 57.525,27.825 57.4,27.7 v1(57.4,9)
  Signal Layer 1 w0.15: v1(57.4,9) 107.178,9 108.328,7.85 111.772,7.85 112.922,9 129.9,9 131.5,10.6 133.1,10.6 v1(133.5,10.2)
~MPU: R71.1 U11.1 X13.28 | length 15.7
  Top Layer w0.15: U11.1@157.825,31.25 156.35,31.25 154.825,32.775 154.825,36.825 155.675,37.675 R71.1@156,37.675 156.175,37.675 160.55,42.05 X13.28@160.63,42.05
~RAM: U12.4 X13.24 | length 34.1
  Top Layer w0.15: U12.4@127.825,41.35 127.9,41.425 v1(127.9,43.8)
  Signal Layer 1 w0.15: v1(127.9,43.8) 153.1,43.8 155.1,45.8 156.76,45.8 X13.24@158.09,47.13
~RD: R52.1 U5.33 U7.A2 U8.A2 X5.23 X6.23 X7.23 X13.25 | length 212.9
  Top Layer w0.125: v1(154,18.2) 156.01,18.2 U7.A2@156.073,18.263 ; v1(166,18.2) 168.01,18.2 U8.A2@168.073,18.263
  Top Layer w0.15: v1(131.6,18.2) 131.6,26.2 133.5,28.1 U5.33@133.5,31.9 ; v1(152.4,18.2) 152.4,24.9 154.275,26.775 154.275,43.315 X13.25@155.55,44.59
  Top Layer w0.25: R52.1@74,90.125 74.51,89.615 74.51,82.13 75.8,80.84 75.8,67.4 74.51,66.11 74.51,62.69 75.8,61.4 75.8,47.4 74.51,46.11 74.51,42.89 75.8,41.6 75.8,38.7 74.7,37.6 v1(74.7,18.2)
  Signal Layer 2 w0.15: v1(74.7,18.2) v1(154,18.2) v1(166,18.2)
~RESET: R49.1 U5.5 U6.1 X5.67 X6.67 X7.67 X9.2 | length 313.9
  Top Layer w0.15: v1(135.8,25.3) 135.8,24.6 135.4,24.2 135.4,23.6 135.8,23.2 v1(135.8,22.2) 135.8,20.3 136.7,19.4 137.4,19.4 138,20 U5.5@138.9,20 ; v1(148.3,25.3) 148.3,28.5 148.6,28.8 148.6,29.9 148.4,30.1 v1(148.4,31.6)
  Top Layer w0.25: U6.1@7.175,107.45 6.25,107.45 5.8,107 5.8,104.275 R49.1@6.675,103.4 13.7,96.375 v1(13.7,86.2) ; X5.67@18.63,84.54 18.63,82.13 19.9,80.86 19.9,67.4 18.63,66.13 18.63,62.67 19.9,61.4 19.9,47.3 18.63,46.03 18.63,42.87 19.9,41.6 19.9,26.2 21.1,25 v1(21.1,22.2) ; v1(182.5,9.4) v1(182.5,28.2)
  Signal Layer 1 w0.15: v1(148.4,31.6) 175.5,31.6 178.9,28.2 v1(182.5,28.2)
  Signal Layer 2 w0.15: v1(21.1,22.2) v1(135.8,22.2) ; v1(135.8,25.3) v1(148.3,25.3)
  Signal Layer 2 w0.25: v1(13.7,86.2) 16.97,86.2 X5.67@18.63,84.54 ; v1(182.5,9.4) 189.8,2.1 197.64,2.1 X9.2@199,3.46
~RF: R53.1 U5.42 X2.C5 | length 262.1
  Top Layer w0.15: U5.42@129,31.9 v1(129,34.6) ; v1(169.3,4.4) 169.8,4.4 170.125,4.725 R53.1@170.125,5 ; v1(179,6.4) 182,9.4 v1(182,27.8)
  Top Layer w0.25: X2.C5@22.54,111 22.54,108.469 30.859,100.15 37.659,100.15 50.109,87.7 v1(50.9,87.7) ; v1(105.1,85) 105.1,35.1 v1(105.6,34.6)
  Signal Layer 2 w0.15: v1(105.6,34.6) v1(129,34.6) 130.7,34.6 131.175,35.075 132.125,35.075 136,31.2 175.5,31.2 178.9,27.8 v1(182,27.8) ; v1(169.3,4.4) 177,4.4 v1(179,6.4)
  Signal Layer 2 w0.25: v1(50.9,87.7) 102.4,87.7 v1(105.1,85)
~RTS: D1.2 R36.2 U3.10 U5.56 | length 174.5
  Top Layer w0.15: D1.2@112.25,38.5 112.55,38.8 v1(113,38.8) ; v1(119.4,38.8) 119.4,29.3 121.2,27.5 U5.56@123.1,27.5
  Top Layer w0.25: R36.2@36.5,103.375 36.5,106.064 40.106,109.67 U3.10@41.6,109.67 ; v1(116.1,93.1) 116.1,92.4 118.5,90 118.5,39.7 v1(119.4,38.8)
  Signal Layer 2 w0.15: v1(113,38.8) v1(119.4,38.8)
  Signal Layer 2 w0.25: v1(36.5,104.7) 36.5,98 37.9,96.6 71.6,96.6 75.1,93.1 v1(116.1,93.1)
~SD0: R62.1 U5.80 X12.2 | length 155.5
  Top Layer w0.15: U5.80@127,16.075 127,14 127.5,13.5 v1(127.5,6.9) ; v1(142.1,6.1) 142.1,5.025 R62.1@142.125,5
  Top Layer w0.25: v1(12.1,19.6) 12.1,17.455 X12.2@12.105,17.45 ; v1(20.6,19.6) 20.6,16.2 22.1,14.7 v1(22.1,7)
  Signal Layer 1 w0.15: v1(22.1,7) 107.127,7 107.727,6.4 112.373,6.4 113.073,7.1 127.3,7.1 v1(127.5,6.9) 127.7,7.1 131.3,7.1 132.3,6.1 v1(142.1,6.1)
  Signal Layer 2 w0.15: v1(12.1,19.6) v1(20.6,19.6)
~SD1: R59.1 U5.83 X10.1 | length 147.8
  Top Layer w0.15: U5.83@128.5,16.075 128.5,15.1 128.4,15 128.4,7.489 128.7,7.189 v1(128.7,5.7) ; v1(149.1,6.1) 149.1,5.025 R59.1@149.125,5
  Top Layer w0.25: X10.1@39.88,31 39.9,30.98 v1(39.9,5.8)
  Signal Layer 2 w0.15: v1(39.9,5.8) 107.16,5.8 107.385,5.575 112.715,5.575 113.415,6.275 126.647,6.275 127.222,5.7 v1(128.7,5.7) 129.825,6.825 131.175,6.825 132.3,5.7 148.7,5.7 v1(149.1,6.1)
~SD2: R55.1 U5.100 X11.1 | length 123.6
  Top Layer w0.15: v1(108.2,3.9) 110,5.7 113.7,5.7 v1(113.8,5.6) ; v1(131.8,4.8) 133.1,6.1 v1(133.1,7.5) ; U5.100@137,16.075 137,14 138.5,12.5 138.5,10.1 v1(138.9,9.7) ; v1(155.3,5.1) 156.025,5.1 R55.1@156.125,5
  Top Layer w0.25: v1(78.88,3.8) X11.1@78.88,31
  Signal Layer 1 w0.15: v1(113.8,5.6) 114.75,4.65 126.328,4.65 126.803,4.175 131.175,4.175 v1(131.8,4.8) 132.3,5.3 155.1,5.3 v1(155.3,5.1)
  Signal Layer 2 w0.15: v1(78.88,3.8) 108.1,3.8 v1(108.2,3.9) ; v1(133.1,7.5) 136.7,7.5 v1(138.9,9.7)
~SM: JP2.1 X13.20 | length 35.1
  Signal Layer 2 w0.15: JP2.1@124.3,51.54 126.26,53.5 156.8,53.5 X13.20@158.09,52.21
~SX: JP2.3 U4.1 | length 44
  Top Layer w0.15: U4.1@101.752,23.59 103.89,23.59 104.6,24.3 104.6,34.2 104.2,34.6 104.2,43.4 v1(104.1,43.5)
  Signal Layer 2 w0.15: v1(104.1,43.5) 106.2,45.6 123.44,45.6 JP2.3@124.3,46.46
~SXM: JP2.2 R54.1 U5.43 | length 124.7
  Top Layer w0.15: v1(120.4,49) 120.4,40 121.7,38.7 v1(121.7,34.2) ; U5.43@128.5,31.9 v1(128.5,34.2) ; v1(162.3,4.8) 162.925,4.8 R54.1@163.125,5 ; v1(178.4,6.4) 181.6,9.6 v1(181.6,27.4)
  Signal Layer 1 w0.15: v1(121.7,34.2) v1(128.5,34.2) 130.7,34.2 131.3,34.8 132,34.8 135.9,30.9 175.4,30.9 178.9,27.4 v1(181.6,27.4)
  Signal Layer 2 w0.15: v1(120.4,49) JP2.2@124.3,49 ; v1(162.3,4.8) 176.8,4.8 v1(178.4,6.4)
~WR: R51.1 U5.32 U11.2 X5.21 X6.21 X7.21 X13.26 | length 169.6
  Top Layer w0.15: v1(133.1,27) 134,27.9 U5.32@134,31.9 ; v1(156.2,27) 156.2,29.6 156.9,30.3 ; U11.2@157.825,30.3 156.9,30.3 ; X13.26@158.09,42.05 154.55,38.51 154.55,32.65 156.9,30.3
  Top Layer w0.25: R51.1@76,90.125 77.05,89.075 77.05,82.13 78.3,80.88 78.3,67.4 77.05,66.15 77.05,62.65 78.3,61.4 78.3,47.4 77.05,46.15 77.05,42.85 78.3,41.6 78.3,38.7 77.3,37.7 v1(77.3,27)
  Signal Layer 1 w0.15: v1(77.3,27) 80.411,27 80.611,26.8 82.389,26.8 82.589,27 v1(133.1,27) v1(156.2,27)
~WRC: U7.G5 U8.G5 U11.4 X13.27 | length 54.7
  Top Layer w0.125: U7.G5@160.573,20.513 160.689,20.513 161.076,20.9 161.486,20.9 161.862,21.277 161.862,25.964 162.898,27 v1(163,27) 163.7,27 163.9,27.2 ; U8.G5@172.573,20.513 172.689,20.513 173.076,20.9 173.486,20.9 173.862,21.277 173.862,25.964 174.898,27 v1(175,27)
  Top Layer w0.15: X13.27@158.09,44.59 159.28,43.4 163.3,43.4 164.3,42.4 164.3,40.222 163.9,39.822 163.9,35.2 163.1,34.4 163.1,30.2 ; U11.4@160.575,29.35 160.75,29.35 161.6,30.2 163.1,30.2 ; 163.9,27.2 163.9,29.4 163.1,30.2
  Signal Layer 1 w0.15: v1(163,27) v1(175,27)
pads on no net: J2.0 J2.4 J2.11 J2.12 J2.15 J3.1 J3.6 J3.9 J4.0 MOD1.6 MOD2.3 SW1.0 SW1.3 SW1.6 SW2.0 U2.7 U2.8 U6.3 U9.3 X2.C2 X3.3 X9.6 X10.0@21.5,28.2 X10.0@42.5,28.2 X10.8 X10.9 X11.0@60.5,28.2 X11.0@81.5,28.2 X11.8 X11.9 X12.1 X12.8 Y3.0
copper on no net:
  other v1: 117,98.4

## Polygon pours and split planes (outlines as drawn)
GND on Signal Layer 2 "GND-MID2" (solid, remove dead copper, pour order 16): 1,1 1,95 32,95 32,131 150,131 150,127 155,127 155,88 223,88 223,1 1,1
GND on Signal Layer 1 "GND-MID1" (solid, remove dead copper, pour order 15): 1,1 1,95 32,95 32,131 150,131 150,127 155,127 155,88 223,88 223,1 1,1
EARTH on Bottom Layer "HV-BOTTOM" (hatched 90Degree grid 0.5 track 0.2, remove dead copper, pour order 20): 157,90 223,90 223,131 193.5,131 193.5,127 157,127 157,90
+3V3 on Bottom Layer "3V3-BOTTOM" (solid, remove dead copper, pour order 19): 176.4,10.1 179.1,12.8 182.3,12.8 185.6,16.1 187.5,16.1 187.5,19.9 187.5,20 185.6,20 176.4,29.2 176.4,10.1
GND on Bottom Layer "GND-BOTTOM" (solid, remove dead copper, pour order 14): 1,1 1,95 32,95 32,131 150,131 150,127 155,127 155,88 223,88 223,1 1,1
GND on Top Layer "GND-TOP" (solid, remove dead copper, pour order 17): 1,1 1,95 32,95 32,131 150,131 150,127 155,127 155,88 223,88 223,1 1,1
EARTH on Top Layer "HV-TOP" (hatched 90Degree grid 0.5 track 0.2, remove dead copper, pour order 18): 157,90 223,90 223,131 193.5,131 193.5,127 157,127 157,90

## Silkscreen, mask and mechanical layers (free items; w line width, h text height)
Top Overlay:
  lines w0.5: 156,128 156,89 224,89
  text "110-240VAC" at 183.5,126 h1
  text "10-16VDC" at 149.5,121.5 h1 r90
  text "RS232" at 46,118 h1
  text "PS2/GPIO" at 70.4,118 h1
  text "RESET" at 8.5,114.5 h1 r90
  text "VIDEO" at 98,114.5 h1
  text "RFIQ MOD" at 15,113 h1
  text "WARNING!" at 202,106 h1.5
  text "+Vin" at 136.7,104 h1
  text "GND" at 142.2,104 h1
  text "HIGH VOLTAGE AREA" at 202,103 h1.2
  text "." at 101.3,100.7 h1
  text "AC-L" at 174.5,94 h1
  text "AC-N" at 194.5,94 h1
  text "EARTH" at 214,94 h1
  text "." at 104,91.7 h1
  text "." at 102.3,86.7 h1
  text "ECCO Electronics LD-series (50.8x50.8)" at 122.8,83 h1
  text "." at 102.35,66.6 h1
  text "ECCO Electronics LA-series (70x48)" at 180.6,66.2 h1
  text "+5V" at 124.3,63 h1
  text "GND" at 134.5,63 h1
  text "+3.3V" at 143.8,63 h1
  text "GND" at 154.82,63 h1
  text "1-2:MPU" at 118.2,56 h1
  text "2-3:SMEM" at 118,54.4 h1
  text "1" at 122.2,51.1 h1
  text "2" at 121.9,48.6 h1
  text "." at 102.35,46.6 h1
  text "3" at 121.9,46 h1
  text "MPU (OPT)" at 152.1,44.3 h1 r90
  text "EN RAM" at 159.7,38 h1
  text "+5V" at 183,37 h1
  text "GND" at 188.5,37 h1
  text "+3.3V" at 199,37 h1
  text "GND" at 206,37 h1
  text "SD1" at 31.5,32.5 h1
  text "SD2" at 70.5,32.5 h1
  text "SERIAL MEM (OPT)" at 91,29.5 h1
  text "SD0" at 7.6,27.7 h1
  text "TOYAGA 16z" at 201.3,13.6 h2
  text "(C) toyaga@mail.com" at 202.3,11.6 h1
  text "Debug/Prog" at 191.86,8.23 h1
  text "." at 200.76,6.93 h2
  text "SOUND" at 115,5 h1 r90
  text "rev.2-6/14" at 206,1.1 h1
  text "uSD0    SD1    SD2    SMEM    RF    +5V   +3.3V" at 140.8,0.5 h1
Bottom Overlay:
  lines w0.5: 156,128 156,89 224,89
  text "TOUCHING THE PADS POSES" at 203.2,125.2 h2
  text "DANGER OF DEATH!" at 195.2,122.2 h2
  text "WARNING!" at 222,106 h1.5
  text "HIGH VOLTAGE AREA" at 222,103 h1.2
Mechanical 1:
  lines w0.5: 0,132 0,132 ; 0,132 151.5,132 151.5,128 192.5,128 192.5,132 224,132 224,0 0,0 0,132

## Text inside footprints (layer, text, board x,y; h text height)
C48: Top Overlay "+" at 66.7,110.6 h1
SPK1: Top Overlay "+" at 104.2,8.9 h1.52; Top Overlay "sound" at 97.2,2.9 h0.75